# Altium PCB PCB1.PcbDoc
Units mm, origin at the board's own origin, x right, y up, seen from the top; angles counter-clockwise.
Board outline 22.22 x 25.65 mm, 2 copper layers (Top Layer, Bottom Layer); 19 components, 28 nets, 88 pads, 22 vias.
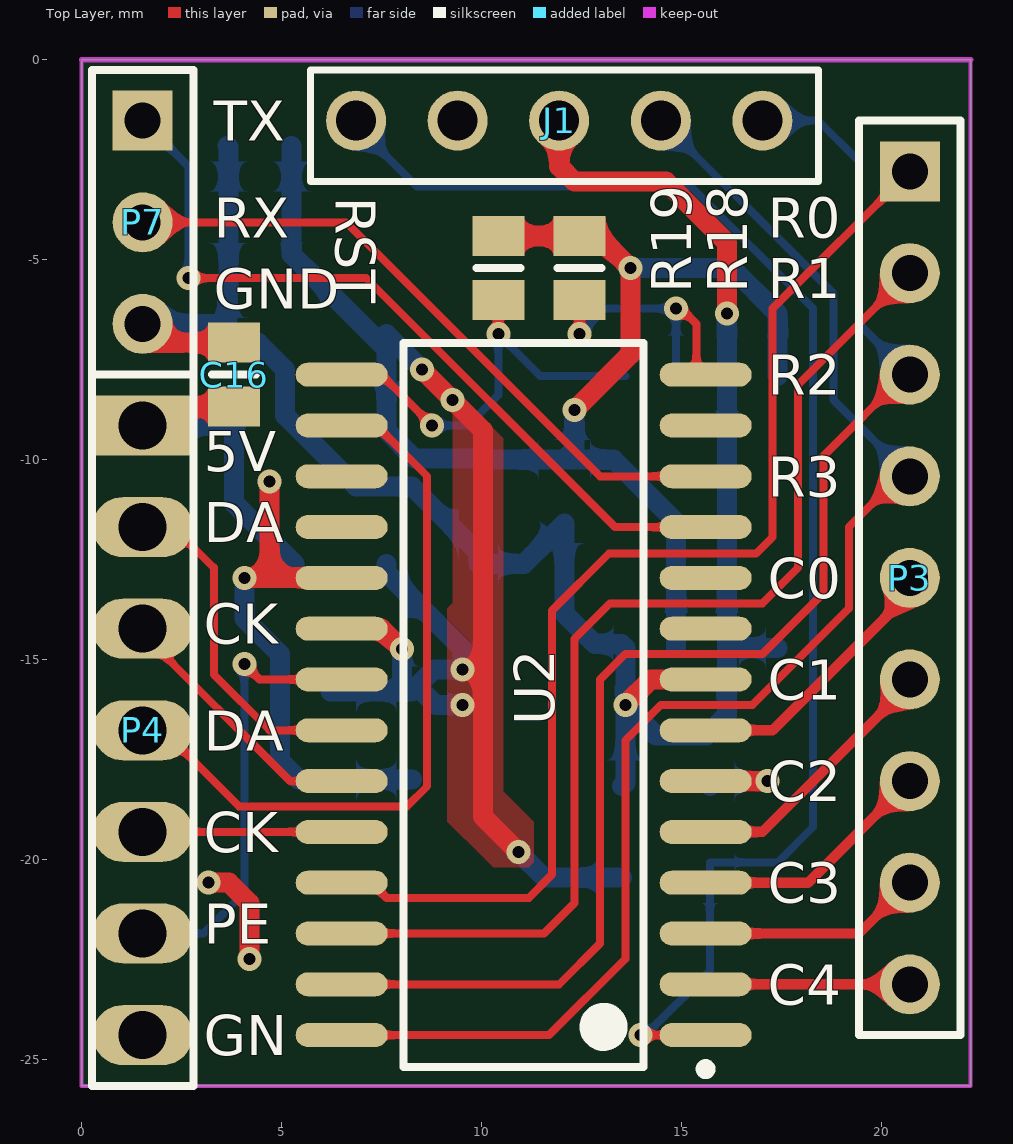
[diagram p0: Top Layer view]
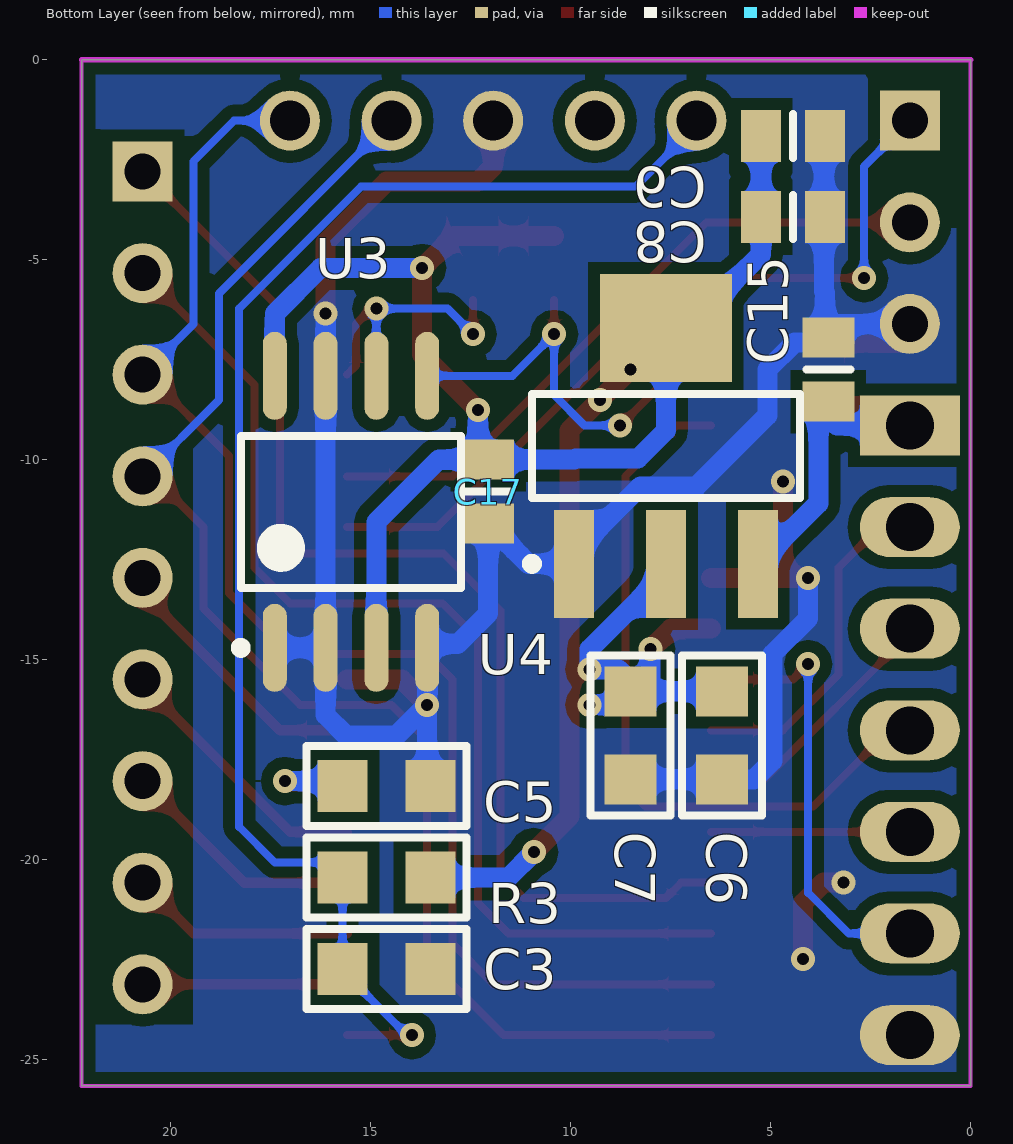
[diagram p1: Bottom Layer view, seen from below]

## Layer stack, top to bottom
Top Solder: solder mask 0.0102, Solder Resist, Dk 3.5
Top Layer: signal copper 0.0356
Dielectric1: dielectric 0.32, FR-4, Dk 4.8
Bottom Layer: signal copper 0.0356
Bottom Solder: solder mask 0.0102, Solder Resist, Dk 3.5

## Board outline
0,-25.654 0,0 22.225,0 22.225,-25.654

## Design rules (kind name [scope] priority, off if disabled: settings)
Clearance [All] p1: gap=0.2
MinimumSolderMaskSliver [All] p1 off: minsoldermaskwidth=0.254
PlaneConnect [All] p1: planeconnectstyle=Direct reliefexpansion=0.508 reliefentries=4 reliefconductorwidth=0.254 reliefairgap=0.254
PolygonConnect [All] p1: connectstyle=Direct reliefconductorwidth=0.254 reliefentries=4 polygonreliefangle="90 Angle" airgapwidth=0.254
RoutingVias [All] p1: holewidth=0.711 width=1.27 viastyle="Through Hole" minholewidth=0.2 minwidth=0.3 maxholewidth=2 maxwidth=3
SilkToSilkClearance [All] p1 off: silktosilkclearance=0.254
SilkToSolderMaskClearance SilkscreenOverComponentPads [IsPad] p1 off: minsilkscreentomaskgap=0.254 clearancetoexposedcopper=TRUE
SolderMaskExpansion [All] p1: expansion=0.102
Width [All] p1: maxlimit=1 minlimit=0.2 preferedwidth=0.254
26 further rules are at their usual default settings.

## Components (designator, comment, footprint, x,y, rotation, side; value= is the part's Value field where it differs from the comment)
C3 "Cap Semi" CAPC2013X05N 14.605,-22.733 r0 bottom
C5 "Cap Semi" CAPC2013X05N 14.605,-18.161 r0 bottom
C6 "Cap Semi" CAPC2013X05N 6.223,-16.891 r90 bottom
C7 "Cap Semi" CAPC2013X05N 8.509,-16.891 r90 bottom
C8 "CL21F104ZBCNNNC" RESC2012L 4.445,-3.937 r180 bottom
C9 "LMK212F106ZG-T" RESC2012L 4.445,-1.905 r180 bottom
C15 "CL21F104ZBCNNNC" RESC2012L 3.556,-7.747 r90 bottom
C16 "LMK212F106ZG-T" RESC2012L 3.81,-7.874 r90 top
C17 "LMK212F106ZG-T" RESC2012L 12.065,-10.795 r270 bottom
J1 "87224-5" CON5 11.938,-1.524 r180 top
P3 "Header 9" HDR1X9 20.701,-2.794 r270 top
P4 "Header 7" HDR1X7 1.524,-9.144 r270 top
P7 "Header 3" HDR1X3 1.524,-1.524 r270 top
R3 "Res3" RESC2013X05N 14.605,-20.447 r0 bottom
R18 "ERJ-6GEYJ331V" RESC2012L 12.446,-5.207 r90 top
R19 "ERJ-6GEYJ331V" RESC2012L 10.414,-5.207 r90 top
U2 "PIC18F24J11-I/SO" SOIC-SO28_N 11.049,-16.129 r180 top
U3 "24AA1025T-I/SM" SOIJ-SM8_N 15.494,-11.303 r90 bottom
U4 "AMS1117" SOT223-4M 7.62,-9.652 r90 bottom

## Footprints (in the part's own frame and the unit in brackets; to place one, negate y for a bottom-side part, rotate by r counter-clockwise, add the part's x,y. Pads: shape width x height; smd on the part's side, far side on the other; paste and mask are expansions set on the pad)
CAPC2013X05N [mm] "Chip Capacitor, 2-Leads, Body 2,0x1,3mm, IPC Medium Density"
  rect 1.25x1.3 smd: 1(-1.1,0) 2(1.1,0)
  silkscreen extent -2,-1 2,1, body extent -1.05,-0.67 1.05,0.68, height 0.5
CON5 [mm]
  round 1.5 hole 1: 1(5.08,0) 2(2.54,0) 3(0,0) 4(-2.54,0) 5(-5.08,0)
  silkscreen extent -6.48,-1.27 6.22,1.52
HDR1X3 [mm] "Connector; Header; 3 Position"
  rect 1.5x1.5 hole 0.9: 1(0,0)
  round 1.5 hole 0.9: 2(2.54,0) 3(5.08,0)
  silkscreen extent -1.27,-1.27 6.35,1.27
HDR1X7 [mm] "Connector; Header; 7 Position"
  rect 1.5x2.5 hole 1.2: 1(0,0)
  oval 1.5x2.5 hole 1.2: 2(2.54,0) 3(5.08,0) 4(7.62,0) 5(10.16,0) 6(12.7,0) 7(15.24,0)
  silkscreen extent -1.27,-1.27 16.51,1.27
HDR1X9 [mm] "Connector; Header; 9 Position"
  rect 1.5x1.5 hole 0.9: 1(0,0)
  round 1.5 hole 0.9: 2(2.54,0) 3(5.08,0) 4(7.62,0) 5(10.16,0) 6(12.7,0) 7(15.24,0) 8(17.78,0) 9(20.32,0)
  silkscreen extent -1.27,-1.27 21.59,1.27
RESC2012L [mm] "Chip Resistor, Body 2.0x1.3mm, IPC High Density"
  rect 1x1.3 smd: 1(-0.8,0) 2(0.8,0)
  silkscreen extent 0,-0.55 0,0.55, body extent -1.07,-0.7 1.07,0.7, height 0.65
RESC2013X05N [mm] "Chip Resistor, 2-Leads, Body 2,0x1,3mm, IPC Medium Density"
  rect 1.25x1.3 smd: 1(1.1,0) 2(-1.1,0)
  silkscreen extent -2,-1 2,1, body extent -1.05,-0.68 1.05,0.67, height 0.5
SOIC-SO28_N [mm] "SOIC, 28-Leads, Body 17.9x7.5mm, Pitch 1.27mm, IPC Medium Density"
  oval 2.3x0.6 smd: 1(-4.55,8.255) 2(-4.55,6.985) 3(-4.55,5.715) 4(-4.55,4.445) 5(-4.55,3.175) 6(-4.55,1.905) 7(-4.55,0.635) 8(-4.55,-0.635) 9(-4.55,-1.905) 10(-4.55,-3.175) 11(-4.55,-4.445) 12(-4.55,-5.715) 13(-4.55,-6.985) 14(-4.55,-8.255) 15(4.55,-8.255) 16(4.55,-6.985) 17(4.55,-5.715) 18(4.55,-4.445) 19(4.55,-3.175) 20(4.55,-1.905) 21(4.55,-0.635) 22(4.55,0.635) 23(4.55,1.905) 24(4.55,3.175) 25(4.55,4.445) 26(4.55,5.715) 27(4.55,6.985) 28(4.55,8.255)
  silkscreen extent -4.67,-9.05 3,9.23, body extent -3.8,-9.06 3.8,9.06, height 2.65
SOIJ-SM8_N [mm] "SOP, 8-Leads, Body 5.2x5.2mm, Pitch 1.27mm, IPC Medium Density"
  oval 2.2x0.6 smd: 1(-3.4,1.905) 2(-3.4,0.635) 3(-3.4,-0.635) 4(-3.4,-1.905) 5(3.4,-1.905) 6(3.4,-0.635) 7(3.4,0.635) 8(3.4,1.905)
  silkscreen extent -3.52,-2.75 1.9,2.88, body extent -2.73,-2.75 2.73,2.75, height 2.04
SOT223-4M [mm] "SOT223, 4-Leads, Body 6.5x3.5mm, Pitch 2.3mm, Lead Span 7mm, IPC Low Density"
  rect 2.7x1 smd: 1(-2.95,2.3) 2(-2.95,0) 3(-2.95,-2.3)
  rect 2.7x3.3 smd: 4(2.95,0)
  silkscreen extent -3.07,-3.35 1.3,3.48, body extent -1.85,-3.35 1.85,3.35, height 1.8

## Part data
C3 C5 C6 C7: "Capacitor (Semiconductor SIM Model)"
C8 C15: library part Cap, "CAP CER 0.1UF 50V Y5V 0805"
C9 C16 C17: library part Cap, "CAP CER 10UF 10V Y5V 0805"
J1: library part CON5, "CONN HEADER VERT .100 5POS 15AU"
P3: "Header, 9-Pin"
P4: "Header, 7-Pin"
P7: "Header, 3-Pin"
R3: "Resistor"
R18 R19: library part Res3, "RES 330 OHM 1/8W 5% 0805 SMD"
U2: "Low Power, High Performance Microcontroller with nanoWatt XLP Technology, 28-pin SOIC, Industrial Temperature"
U3: "1 Mbit, 400kHz, 1.7V, I2C Serial EEPROM, 8-Pin SOIC 208mil, Industrial Temperature, Tape and Reel"
U4: "Adjustable Precision Shunt Regulator"

## Via types
v1: diameter 0.6, hole 0.3, Top Layer to Bottom Layer, 22 vias

## Nets (pads, with @x,y where several pads share a name; then routed paths per layer and width w, separated by ;. In a path a pad name is that pad's centre, name@x,y a point inside that pad or via, vN(x,y) a via of type N, cw(c..) or ccw(c..) an arc to the next point about the centre after c; other vN are vias at no path point)
C0: P3.5 U2.7 | length 6.9
  Top Layer w0.254: U2.7 17.272,-16.764 20.701,-13.335 P3.5
C1: P3.6 U2.5 | length 6.8
  Top Layer w0.254: U2.5 17.018,-19.304 20.701,-15.621 P3.6
C2: P3.7 U2.4 | length 6.2
  Top Layer w0.254: U2.4 18.161,-20.574 P3.7
C3: P3.8 U2.3 | length 5.6
  Top Layer w0.254: U2.3 19.431,-21.844 P3.8
C4: P3.9 U2.2 | length 5.1
  Top Layer w0.254: U2.2 P3.9
C5: U2.13
CLK1: P4.3 U2.23 | length 6.6
  Top Layer w0.2: P4.3 1.524,-14.351 5.207,-18.034 U2.23
CLK2: P4.5 U2.24 | length 5
  Top Layer w0.2: P4.5 U2.24
DAT1: P4.2 U2.22 | length 8.6
  Top Layer w0.2: P4.2 2.286,-11.684 3.302,-12.7 3.302,-15.367 4.699,-16.764 U2.22
DAT2: P4.4 U2.16 | length 18.5
  Top Layer w0.2: P4.4 2.032,-16.764 3.937,-18.669 8.128,-18.669 8.636,-18.161 8.636,-10.414 7.366,-9.144 U2.16
GND: C3.1 C5.1 C6.1 C7.1 C8.2 C9.2 C15.2 C16.2 C17.2 J1.3 P4.7 P7.3 U2.8 U2.19 U3.1 U3.2 U3.4 U3.7 U4.1 | length 69.6
  Top Layer w0.5: P7.3 1.994,-7.074 C16.2 ; v1(3.175,-20.574) 3.683,-20.574 4.191,-21.082 v1(4.191,-22.479) ; v1(4.064,-12.954) 4.699,-12.954 ; v1(4.699,-10.541) 4.699,-12.954 ; U2.19 4.699,-12.954 ; J1.3 11.938,-2.667 12.319,-3.048 14.605,-3.048 16.129,-4.572 v1(16.129,-6.35) ; v1(13.589,-16.129) 14.224,-15.494 U2.8
  Bottom Layer w0.5: P7.3 3.34,-6.604 C15.2@3.645,-6.909 ; C9.2@3.645,-2.159 3.671,-2.185 3.671,-5.798 3.645,-5.824 C15.2@3.645,-6.909 ; v1(4.064,-12.954) 4.064,-13.97 4.953,-14.859 4.953,-17.526 5.418,-17.991 C6.1 C7.1@8.255,-17.991 ; C5.1 13.589,-18.077 v1(13.589,-16.129) ; v1(16.129,-6.35) U3.7 U3.2 ; U3.1 U3.2 ; C15.2@3.645,-6.909 3.81,-7.074 4.407,-7.074 5.08,-7.747 5.08,-8.89 6.861,-10.671 8.258,-10.671 9.92,-12.333 U4.1 11.058,-12.602 C17.2 12.065,-13.843 12.827,-14.605 13.491,-14.605 U3.4 v1(13.589,-16.129) ; v1(13.589,-16.129) 14.351,-16.891 15.621,-16.891 16.129,-16.383 U3.2
LED: U2.10
MCU_RXD0: U2.18
MCU_TXD0: U2.17
NetC5_2: C5.2 U2.6 | length 3
  Top Layer w0.5: U2.6 v1(17.145,-18.034)
  Bottom Layer w0.5: C5.2 15.832,-18.034 v1(17.145,-18.034)
PGC: J1.5 P3.3 U2.27 | length 35.1
  Top Layer w0.2: U2.27 11.938,-23.114 12.954,-22.098 12.954,-15.494 13.589,-14.859 17.018,-14.859 18.542,-13.335 18.542,-9.906 20.574,-7.874 P3.3
  Bottom Layer w0.2: J1.5 18.415,-1.524 19.431,-2.54 19.431,-6.604 P3.3
PGD: J1.4 P3.4 U2.28 | length 35.8
  Top Layer w0.2: U2.28 11.684,-24.384 13.589,-22.479 13.589,-17.018 14.478,-16.129 16.764,-16.129 19.177,-13.716 19.177,-11.684 20.447,-10.414 P3.4
  Bottom Layer w0.2: J1.4 18.796,-5.842 18.796,-8.509 P3.4
PRE: P4.6 U2.21 | length 11.3
  Top Layer w0.2: v1(4.064,-15.113) 4.445,-15.494 U2.21
  Bottom Layer w0.2: P4.6 3.048,-21.844 4.064,-20.828 v1(4.064,-15.113)
R0: P3.1 U2.25 | length 29.1
  Top Layer w0.2: U2.25 7.239,-20.574 7.62,-20.955 11.176,-20.955 11.76,-20.371 11.76,-13.767 13.176,-12.351 16.859,-12.351 17.272,-11.938 17.272,-6.223 P3.1
R1: P3.2 U2.26 | length 27.6
  Top Layer w0.2: U2.26 11.557,-21.844 12.319,-21.082 12.319,-14.478 13.208,-13.589 17.018,-13.589 17.907,-12.7 17.907,-8.128 P3.2
RLKA: U2.9
RST: C3.2 J1.1 R3.1 U2.1 | length 36.1
  Top Layer w0.2: v1(13.97,-24.384) U2.1
  Bottom Layer w0.2: J1.1 6.858,-1.651 8.382,-3.175 15.24,-3.175 18.288,-6.223 18.288,-19.177 17.399,-20.066 15.705,-20.066 R3.1 C3.2 15.705,-22.776 14.097,-24.384 v1(13.97,-24.384)
RX: P7.2 U2.12 | length 16.7
  Top Layer w0.2: P7.2 6.604,-4.064 12.954,-10.414 U2.12
SCL: R18.1 U2.14 U3.6 | length 7.2
  Top Layer w0.2: v1(12.446,-6.858) R18.1 ; v1(14.859,-6.223) 14.986,-6.223 15.367,-6.604 15.367,-7.642 U2.14
  Bottom Layer w0.2: v1(12.446,-6.858) 13.081,-6.223 v1(14.859,-6.223) U3.6
SDA: R19.1 U2.15 U3.5 | length 10.7
  Top Layer w0.2: U2.15 7.493,-7.874 v1(8.763,-9.144) ; v1(10.414,-6.858) R19.1
  Bottom Layer w0.2: v1(8.763,-9.144) 9.652,-9.144 10.414,-8.382 v1(10.414,-6.858) 11.459,-7.903 U3.5
TX: P7.1 U2.11 | length 19.9
  Top Layer w0.2: v1(2.667,-5.461) 7.112,-5.461 13.335,-11.684 U2.11
  Bottom Layer w0.2: P7.1 2.667,-2.667 v1(2.667,-5.461)
VCC: C15.1 C16.1 P4.1 U4.3 | length 9.5
  Top Layer w0.5: P4.1 1.994,-8.674 C16.1
  Bottom Layer w0.5: P4.1 3.34,-9.144 3.81,-8.674 3.81,-11.092 U4.3
VCC_MCU: C6.2 C7.2 C8.1 C9.1 C17.1 R3.2 R18.2 R19.2 U2.20 U3.3 U3.8 U4.2 U4.4 | length 63.3
  Top Layer w0.5: U2.20 7.493,-14.224 v1(8.001,-14.732) ; v1(8.509,-7.747) v1(9.271,-8.509) 10.033,-9.271 10.033,-15.24 ; v1(9.525,-15.24) 10.033,-15.24 ; R19.2 R18.2 12.916,-4.407 v1(13.716,-5.207) 13.716,-7.366 v1(12.319,-8.763) ; v1(10.922,-19.812) 10.033,-18.923 10.033,-15.24
  Bottom Layer w0.5: C9.1@5.245,-2.159 C8.1 5.245,-4.864 U4.4@7.62,-7.239 ; C6.2 C7.2@8.255,-15.791 ; U4.2 7.62,-12.827 9.525,-14.732 v1(9.525,-15.24) 8.806,-15.24 C7.2@8.255,-15.791 ; v1(8.001,-14.732) 8.001,-15.537 C7.2@8.255,-15.791 ; C7.2 8.847,-16.129 v1(9.525,-16.129) ; v1(8.509,-7.747) 7.62,-6.858 U4.4@7.62,-7.239 ; v1(10.922,-19.812) 11.557,-20.447 R3.2 ; v1(12.319,-8.763) 12.319,-9.741 C17.1 ; v1(13.716,-5.207) 16.256,-5.207 17.399,-6.35 U3.8 ; U3.3 14.859,-11.557 13.297,-9.995 C17.1 ; U4.4@7.62,-7.239 7.62,-9.271 8.317,-9.968 9.879,-9.968 9.906,-9.995 C17.1
pads on no net: J1.2

## Polygon pours and split planes (outlines as drawn)
GND on Bottom Layer "Bottom Layer-No Net 1" (solid, pour order 4): 0,0 0,-25.654 22.225,-25.654 22.225,0
VCC_MCU on Top Layer "Bottom Layer-No Net" (solid, remove dead copper, pour order 5): 9.271,-8.763 9.271,-16.383 9.398,-16.51 9.906,-16.51 9.906,-8.832 9.329,-8.255
VCC_MCU on Top Layer "Bottom Layer-No Net" (solid, remove dead copper, pour order 3): 9.271,-8.763 9.652,-9.144 9.652,-9.271 9.652,-13.208 9.398,-13.462 9.144,-13.716 9.144,-14.986 9.144,-19.05 10.033,-19.939 10.287,-20.193 10.922,-20.193 11.176,-20.193 11.303,-20.066 11.303,-19.685 11.303,-19.05 10.541,-18.288 10.541,-15.875 10.541,-9.398 10.16,-9.017 9.398,-8.255 9.144,-8.255 9.144,-8.382 9.271,-8.509

## Keep-outs
Keep-Out Layer:
  the board outline again, w0.1

## Other copper
Bottom Layer:
  pour cut-out: 19.431,-1.905 19.431,-24.13 22.225,-24.13 22.225,-1.905

## Silkscreen, mask and mechanical layers (free items; w line width, h text height)
Top Overlay:
  text "TX" at 3.302,-2.032 h1
  text "RST" at 6.35,-3.429 h1 r270
  text "RX" at 3.302,-4.445 h1
  text "R0" at 17.145,-4.445 h1
  text "R1" at 17.145,-5.969 h1
  text "GND" at 3.302,-6.223 h1
  text "R2" at 17.145,-8.382 h1
  text "5V" at 3.048,-10.287 h1
  text "R3" at 17.145,-10.922 h1
  text "DA" at 3.048,-12.065 h1
  text "C0" at 17.145,-13.462 h1
  text "CK" at 3.048,-14.605 h1
  text "C1" at 17.145,-16.002 h1
  text "DA" at 3.048,-17.272 h1
  text "C2" at 17.145,-18.542 h1
  text "CK" at 3.048,-19.812 h1
  text "C3" at 17.145,-21.082 h1
  text "PE" at 3.048,-22.098 h1
  text "C4" at 17.145,-23.622 h1
  text "GN" at 3.048,-24.892 h1
Mechanical 13:
  lines w0.1: -21.336,3.302 18.664,3.302